# Altium PCB Carrier_Board.PcbDoc (part 2 of 2)
Units mil, origin at the board's own origin, x right, y up, seen from the top; angles counter-clockwise.
Board outline 6800 x 4000 mil, 4 copper layers (Top Layer, PWR, GND, Bottom Layer), stack 62.8 mil thick; 110 components, 87 nets, 805 pads, 134 vias.
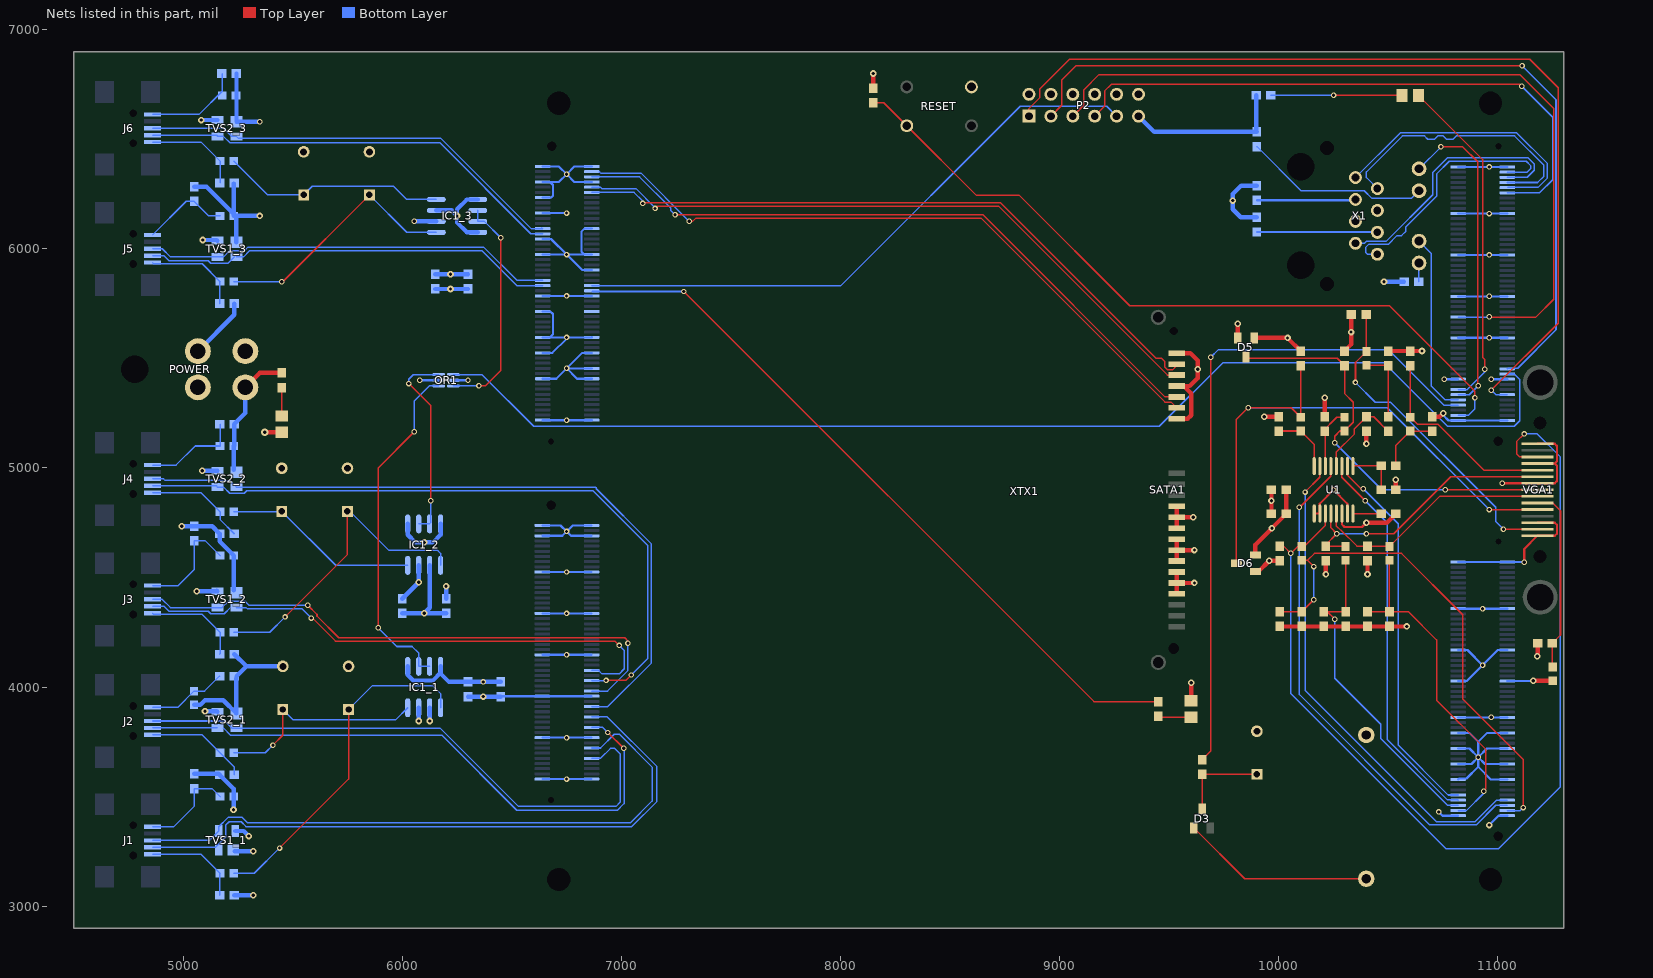
[diagram p4: the nets of this part, all layers, seen from the top]

## Part data
BATTERY: "16mm Battery Holder - Memory Protection Devices"
C1 C2 C4_1 C4_2 C4_3 C5_1 C5_2 C5_3 C8_1 C8_2 C8_3 C9_1 C9_2 C9_3 C10_1 C10_2 C10_3 C11_1 C11_2 C11_3 C12 C13 C14 C15 C16 C17 C18 C19 C20 C21 C22 C23 C24 C25 C26 C27 C28 C29: "Capacitor"
C3 C6_1 C6_2 C6_3 C7_1 C7_2 C7_3: "Polarized Capacitor (Radial)"
D3: "Dual Surface Mount Switching Diode"
D5 D6: "Low Capacitance Diode Array for ESD Protection"
ETH_LED PWR_LED SATA_LED: library part LED1, "Typical RED GaAs LED"
FB1_1 FB1_2 FB1_3 FB2_1 FB2_2 FB2_3 FB4_1 FB4_2 FB4_3 FB5 FB6 FB7 FB8 FB9 FB10 FB11 FB12: library part "Ferrite Bead", "Ferrite Bead"
FB3_1 FB3_2 FB3_3: library part "Ferrite Bead"
IC1_1 IC1_2 IC1_3: "Micrel MIC2026 Dual-Channel Power Distribution Switch"
J1 J2 J3 J4 J5 J6: "miniUSB Type B SMT Connector"
OR1: "3 Input OR Gate"
P2: "Header, 6-Pin, Dual row"
POWER: library part "0039300040 Mini-Fit 2x2 Right Angle"
R1 R2 R3 R4 R5 R6 R7 R8 R9 R10 R11 R12 R13 R14: "Resistor"
RESET: "FSM 6mm Series Switch"
SATA1: "SATA HDD, FCI Part# 10029364"
TVS1_1 TVS1_2 TVS1_3 TVS2_1 TVS2_2 TVS2_3: "IC TVS ARRAY 2-LINE 5V SOT-143"
U1: "VGA ESD Protection"
VGA1: library part VGA
X1: "Modular RJ45 Jack w/ Magnetics & LEDs"

## Via types
v1: diameter 25, hole 15, Top Layer to Bottom Layer, 85 vias
v2: diameter 30, hole 15, Top Layer to Bottom Layer, 47 vias
v3: diameter 35, hole 15, Top Layer to Bottom Layer, 1 vias
v4: diameter 30, hole 15, Top Layer to Bottom Layer, tented bottom, 1 vias

## Nets (pads, with @x,y where several pads share a name; then routed paths per layer and width w, separated by ;. In a path a pad name is that pad's centre, name@x,y a point inside that pad or via, vN(x,y) a via of type N, cw(c..) or ccw(c..) an arc to the next point about the centre after c; other vN are vias at no path point)
5V: C4_1.2 C4_2.2 C4_3.2 C5_1.2 C5_2.2 C5_3.2 C26.2 C27.2 D5.2 D6.2 FB12.1 IC1_1.1 IC1_1.4 IC1_1.7 IC1_2.1 IC1_2.4 IC1_2.7 IC1_3.1 IC1_3.4 IC1_3.7 OR1.5 P2.11 POWER.2 POWER.3 PWR_LED.1 R2.1 R3.1 R4.1 R10.2 R11.2 R14.2 SATA1.P7 SATA1.P8 SATA1.P9 SATA_LED.1 TVS1_1.4 TVS1_2.4 TVS1_3.4 TVS2_1.4 TVS2_2.4 TVS2_3.4 U1.1 U1.2 U1.7 XTX1.19 XTX1.20 XTX1.51 XTX1.52 XTX1.83 XTX1.84 XTX1.119 XTX1.151 XTX1.152 XTX1.174 XTX1.180 XTX1.183 XTX1.184 XTX1.239 XTX1.240 XTX1.253 XTX1.281 XTX1.282 XTX1.317 XTX1.318 XTX1.349 XTX1.350 XTX1.381 XTX1.382 | length 6976.4
  Top Layer w10: U1.1@10161.81,4791.73 U1.2@10187.01,4791.73 10187.01,4837.01 v1(10250,4900) 10312.99,4837.01 U1.7@10312.99,4791.73
  Top Layer w20: v3(5372.6,5162.6) PWR_LED.1@5450,5162.6 ; R14.2@8150,6733.46 v2(8150,6800) ; SATA1.P9@9535,4575 SATA1.P8@9535,4625 ; SATA1.P7@9535,4675 SATA1.P8@9535,4625 ; SATA_LED.1@9600,3937.4 v2(9600,4020) ; v2(9615,4625) SATA1.P8@9535,4625 ; D5.2@9812.6,5593.31 v2(9812.6,5657.4) ; D6.2@9893.31,4602.4 9893.31,4649.84 C26.2@10033.46,4790 C27.2@10033.46,4900 ; v2(10400,5110) R10.2@10400,5166.54 ; R11.2@10533.46,4900 v2(10533.46,4946.54) ; v2(11161.5,4028.5) FB12.1@11250,4028.5
  Bottom Layer w10: OR1.5@6233.46,5400 v1(6300,5400) ; XTX1.83@6639.37,3769.09 XTX1.84@6863.78,3769.09 ; XTX1.51@6639.37,4147.05 XTX1.52@6863.78,4147.05 ; XTX1.19@6639.37,4525 XTX1.20@6863.78,4525 ; XTX1.183@6640.35,5406.89 6702.76,5406.89 v1(6750,5454.13) ; XTX1.151@6640.35,5784.84 XTX1.152@6864.76,5784.84 ; XTX1.119@6640.35,6162.8 v1(6750,6162.8) ; XTX1.184@6864.76,5406.89 6797.24,5406.89 v1(6750,5454.13) ; XTX1.180@6864.76,5454.13 v1(6750,5454.13) ; XTX1.174@6864.76,5525 6820.87,5525 v1(6750,5454.13) ; v1(10754.92,5404.92) XTX1.318@10818.5,5404.92 ; XTX1.240@10818.5,3861.61 XTX1.239@11042.91,3861.61 ; XTX1.282@10818.5,4357.68 XTX1.281@11042.91,4357.68 ; XTX1.350@10818.5,5782.87 XTX1.349@11042.91,5782.87 ; XTX1.382@10818.5,6160.83 XTX1.381@11042.91,6160.83 ; v1(10970,5404.92) XTX1.317@11042.91,5404.92 ; XTX1.253@11042.91,4026.97 v2@11159.96,4026.97
  Bottom Layer w20: v2(5062.6,4437.4) TVS1_2.4@5156.69,4437.4 TVS1_2.4@5154.09,4440 ; v2(5082.6,6587.4) TVS2_3.4@5156.69,6587.4 ; v2(5087.4,4987.4) TVS2_2.4@5156.69,4987.4 ; v2(5090,6040) 5154.09,6040 TVS1_3.4@5156.69,6037.4 ; v2(5100,3890) 5154.09,3890 TVS2_1.4@5156.69,3887.4 ; TVS1_1.4@5237.4,3343.31 5276.69,3343.31 v2(5300,3320) ; C4_2.2@6000,4403.46 v2(6075,4478.46) IC1_2.7@6075,4555.51 ; IC1_1.1@6025,4094.49 6025,4055 6050,4030 6140,4030 6175,4065 IC1_1.4@6175,4094.49 ; IC1_2.1@6025,4744.49 6025,4695 6060,4660 6140,4660 6175,4695 IC1_2.4@6175,4744.49 ; v2(6075,3845) IC1_1.7@6075,3905.51 ; C5_3.2@6150,5883.46 C4_3.2@6300,5883.46 ; IC1_3.7@6155.51,6175 6225,6175 v2(6250,6150) ; IC1_1.4@6175,4061.93 6213.46,4023.46 C5_1.2@6300,4023.46 C4_1.2@6450,4023.46 ; C5_2.2@6200,4403.46 v2(6200,4460) ; IC1_3.4@6344.49,6075 6295,6075 6250,6120 v2(6250,6150) ; IC1_3.1@6344.49,6225 6295,6225 6250,6180 v2(6250,6150) ; P2.11@9360,6605 9431.54,6533.46 R3.1@9900,6533.46 ; R3.1@9896.54,6536.93 R4.1@9896.54,6700 ; v2(10480,5850) R2.1@10571.54,5850
  other v1: 6750,3769.09 10970,3861.61 6370,4023.46 6750,4147.05 10930,4357.68 6750,4525 10960,5782.87 6750,5784.84 10960,6160.83
  other v2: 6100,4660 9968.69,4725.23 6220,5883.46
BATT: R5.2 XTX1.308 | length 3101
  Top Layer w7: R5.2@9650,3668.46 9690,3708.46 v1(9690,5505)
  Bottom Layer w7: v1(9690,5505) 9725,5540 10500,5540 10753.19,5286.81 XTX1.308@10818.5,5286.81
DDCK: U1.11 XTX1.208 | length 1798.6
  Top Layer w7: U1.11@10287.8,5008.27 10287.8,4957.2 v1(10395,4850)
  Bottom Layer w7: v1(10395,4850) 10495,4750 10495,3760 10770,3485 XTX1.208@10817.17,3485 ; XTX1.208@10790.58,3485 XTX1.208@10817.17,3485 ; XTX1.208@10818.5,3483.66 XTX1.208@10817.17,3485
DDDA: U1.10 XTX1.210 | length 1769.6
  Top Layer w7: U1.10@10312.99,5008.27 10312.99,4967.01 10375,4905 v1(10385,4905)
  Bottom Layer w7: v1(10385,4905) 10545,4745 10545,3735 10772.72,3507.28 XTX1.210@10818.5,3507.28 XTX1.210@10791.92,3507.28
EXTSMI#: P2.3 XTX1.321 | length 3877.6
  Top Layer w7: P2.3@8960,6605 9010,6655 9010,6770 9075,6835 v1(11110,6835)
  Bottom Layer w7: XTX1.321@11042.91,5452.17 11045.75,5455 11090,5455 11265,5630 11265,6680 v1(11110,6835)
GND: BATTERY.- C1.2 C2.2 C3.2 C4_1.1 C4_2.1 C4_3.1 C5_1.1 C5_2.1 C5_3.1 C6_1.2 C6_2.2 C6_3.2 C7_1.2 C7_2.2 C7_3.2 C8_1.1 C8_2.1 C8_3.1 C9_1.1 C9_2.1 C9_3.1 C10_1.1 C10_2.1 C10_3.1 C11_1.1 C11_2.1 C11_3.1 C12.2 C13.2 C14.2 C15.2 C16.2 C17.2 C18.1 C19.1 C20.1 C21.1 C22.1 C23.1 C24.1 C25.1 C26.1 C27.1 C28.1 C29.1 D5.1 D6.1 FB2_1.1 FB2_2.1 FB2_3.1 FB4_1.1 FB4_2.1 FB4_3.1 IC1_1.6 IC1_2.6 IC1_3.6 OR1.2 P2.2 P2.4 P2.6 P2.8 P2.10 P2.12 POWER.1 POWER.4 R1.1 R7.2 R8.2 R9.2 RESET.4 SATA1.P4 SATA1.P5 SATA1.P6 SATA1.P10 SATA1.P11 SATA1.P12 SATA1.S1 SATA1.S4 SATA1.S7 TVS1_1.1 TVS1_2.1 TVS1_3.1 TVS2_1.1 TVS2_2.1 TVS2_3.1 U1.6 VGA1.5 VGA1.6 VGA1.7 VGA1.8 VGA1.10 X1.4 X1.5 XTX1.1 XTX1.2 XTX1.5 XTX1.6 XTX1.35 XTX1.36 XTX1.67 XTX1.68 XTX1.99 XTX1.100 XTX1.101 XTX1.102 XTX1.107 XTX1.108 XTX1.113 XTX1.126 XTX1.129 XTX1.135 XTX1.136 XTX1.142 XTX1.157 XTX1.167 XTX1.168 XTX1.173 XTX1.199 XTX1.200 XTX1.201 XTX1.202 XTX1.215 XTX1.216 XTX1.221 XTX1.222 XTX1.227 XTX1.228 XTX1.233 XTX1.234 XTX1.254 XTX1.265 XTX1.266 XTX1.299 XTX1.300 XTX1.301 XTX1.302 XTX1.333 XTX1.334 XTX1.365 XTX1.366 XTX1.399 XTX1.400 | length 15140.4
  Top Layer w10: U1.6@10287.8,4791.73 10287.8,4742.2 10300,4730 10380,4730 v2(10400,4750) ; v1(11020,4930) VGA1.8@11180,4930 11260,4930 11270,4940 11270,5010 11260,5020 ; v1(11120,4570) 11120,4630 VGA1.5@11180,4690 11260,4690 11270,4700 11270,4740 11260,4750 VGA1.10@11180,4750 ; VGA1.7@11180,5020 11260,5020 ; VGA1.6@11180,5110 11260,5110 11270,5100 11270,5030 11260,5020
  Top Layer w20: POWER.4@5283.94,5367.32 5350.08,5433.46 R1.1@5450,5433.46 ; SATA1.S7@9534.65,5223.82 9583.82,5223.82 9600,5240 9600,5340 SATA1.S4@9566.18,5373.82 ; SATA1.S4@9534.65,5373.82 SATA1.S4@9566.18,5373.82 ; SATA1.S1@9534.65,5523.82 9596.18,5523.82 9630,5490 v2(9630,5450) 9630,5410 9593.82,5373.82 SATA1.S4@9566.18,5373.82 ; SATA1.P12@9535,4425 SATA1.P11@9535,4475 ; SATA1.P10@9535,4525 SATA1.P11@9535,4475 ; SATA1.P6@9535,4725 SATA1.P5@9535,4775 ; SATA1.P4@9535,4825 SATA1.P5@9535,4775 ; v2(9610,4775) SATA1.P5@9535,4775 ; v2(9615,4475) SATA1.P11@9535,4475 ; D5.1@9887.4,5593.31 v2(10040.16,5593.31) C29.1@10100,5533.46 ; D6.1@9893.31,4527.6 9907.6,4527.6 v2(9956.54,4576.54) C17.2@10005,4576.54 ; v2(9933.46,5233.46) C22.1@10000,5233.46 ; C26.1@9966.54,4790 C27.1@9966.54,4900 ; R9.2@10005,4276.54 C14.2@10105,4276.54 R8.2@10205,4276.54 C13.2@10305,4276.54 R7.2@10405,4276.54 C12.2@10505,4276.54 v2(10583.46,4276.54) ; C23.1@10210,5233.46 v2(10210,5320) ; v2(10215,4515) C16.2@10215,4576.54 ; C28.1@10300,5533.46 10330,5563.46 v2(10330,5620) ; v2@10331.54,5621.54 C20.1@10331.54,5700 ; v2(10400,4750) 10493.46,4750 C21.1@10533.46,4790 ; v2(10405,4515) C15.2@10405,4576.54 ; C24.1@10500,5533.46 C19.1@10600,5533.46 v2(10653.46,5533.46) ; C25.1@10700,5233.46 10733.46,5233.46 v2(10750,5250) ; v2@11181.54,4141.54 C18.1@11181.54,4200
  Bottom Layer w10: v1(6080,5400) OR1.2@6166.54,5400 ; C4_1.1@6451.54,3958.07 XTX1.67@6639.37,3958.07 XTX1.68@6863.78,3958.07 ; XTX1.99@6639.37,3580.12 XTX1.100@6863.78,3580.12 ; XTX1.35@6639.37,4336.02 XTX1.36@6863.78,4336.02 ; XTX1.5@6639.37,4690.35 6730.35,4690.35 v1(6750,4710) ; XTX1.1@6639.37,4737.6 6722.4,4737.6 v1(6750,4710) ; XTX1.199@6640.35,5217.91 XTX1.200@6864.76,5217.91 ; XTX1.173@6640.35,5525 6685,5525 v1@6750,5590 ; XTX1.157@6640.35,5713.98 6676.02,5713.98 6687.79,5702.21 6687.79,5609.65 XTX1.167@6674.01,5595.87 ; XTX1.135@6640.35,5973.82 v1(6750,5973.82) ; XTX1.129@6640.35,6044.69 6679.13,6044.69 v1(6750,5973.82) ; XTX1.113@6640.35,6233.66 6680,6233.66 6687.79,6241.45 6687.79,6290.75 XTX1.107@6674.01,6304.53 ; XTX1.107@6640.35,6304.53 XTX1.107@6674.01,6304.53 ; XTX1.101@6640.35,6375.39 6714.61,6375.39 v1(6750,6340) ; XTX1.167@6640.72,5595.5 v1(6750,5595.5) 6864.4,5595.5 XTX1.168@6864.76,5595.87 ; XTX1.6@6863.78,4690.35 6769.65,4690.35 v1(6750,4710) ; XTX1.2@6863.78,4737.6 6777.6,4737.6 v1(6750,4710) ; XTX1.142@6864.76,5902.95 6820.87,5902.95 v1(6750,5973.82) ; XTX1.136@6864.76,5973.82 XTX1.136@6831.11,5973.82 ; XTX1.126@6864.76,6091.93 6831.11,6091.93 6817.33,6078.15 6817.33,5987.6 XTX1.136@6831.11,5973.82 ; XTX1.108@6864.76,6304.53 6785.47,6304.53 v1(6750,6340) ; XTX1.102@6864.76,6375.39 6785.39,6375.39 v1(6750,6340) ; v1(10730,3430) 10747.2,3412.8 XTX1.202@10818.5,3412.8 ; v2@10750,5240 10774.06,5215.94 XTX1.302@10818.5,5215.94 XTX1.301@11042.91,5215.94 ; XTX1.222@10818.5,3649.02 10879.02,3649.02 v1(10910,3680) ; XTX1.228@10818.5,3719.88 10870.12,3719.88 v1(10910,3680) ; XTX1.234@10818.5,3790.75 10869.25,3790.75 10910,3750 ; XTX1.254@10818.5,4026.97 10856.97,4026.97 v1(10930,4100) ; XTX1.266@10818.5,4168.7 10861.3,4168.7 v1(10930,4100) ; XTX1.300@10818.5,4570.28 XTX1.299@11042.91,4570.28 ; XTX1.334@10818.5,5593.9 XTX1.333@11042.91,5593.9 ; XTX1.366@10818.5,5971.85 XTX1.365@11042.91,5971.85 ; XTX1.400@10818.5,6373.43 XTX1.399@11042.91,6373.43 ; XTX1.216@10820.35,3580 XTX1.216@10818.5,3578.15 10823.24,3582.88 10856.89,3582.88 10910,3635.99 ; v2(10960,3370) 11002.8,3412.8 XTX1.201@11042.91,3412.8 ; XTX1.215@11042.91,3578.15 10967.84,3578.15 10910,3635.99 ; XTX1.221@11042.91,3649.02 10940.98,3649.02 v1(10910,3680) ; XTX1.227@11042.91,3719.88 10949.88,3719.88 v1(10910,3680) ; XTX1.233@11042.91,3790.75 10950.75,3790.75 10910,3750 ; XTX1.265@11042.91,4168.7 10998.7,4168.7 v1(10930,4100) ; XTX1.299@11043.19,4570 v1(11120,4570) ; XTX1.107@6674.01,6304.53 6714.53,6304.53 v1(6750,6340) ; v1(6750,5973.82) XTX1.136@6831.11,5973.82 ; 10910,3635.99 v1(10910,3680) ; v1(10910,3680) 10910,3750
  Bottom Layer w20: v2(4993.46,4733.46) C9_2.1@5050,4733.46 5133.07,4733.46 C10_2.1@5166.54,4700 5166.54,4664.96 FB2_2.1@5231.5,4600 TVS1_2.1@5231.5,4441.34 ; C9_1.1@5050,3603.46 C10_1.1@5163.07,3603.46 ; FB4_1.1@5050,3918.5 5078.5,3918.5 5100,3940 5182.83,3940 TVS2_1.1@5243.31,3879.53 C11_1.1@5243.31,4040.16 ; C9_3.1@5050,6283.46 5106.54,6283.46 FB2_3.1@5231.5,6158.5 ; POWER.1@5067.4,5532.68 5233.46,5698.74 C8_3.1@5233.46,5750 ; C10_1.1@5166.54,3600 5231.5,3535.04 FB2_1.1@5231.5,3500 v4@5231.5,3441.5 ; TVS2_2.1@5231.5,4991.34 FB4_2.1@5231.5,5100 ; C10_3.1@5231.5,6298.03 FB2_3.1@5231.5,6158.5 ; C8_1.1@5233.46,3050 v2(5320,3050) ; C8_2.1@5233.46,4150 5289.08,4094.39 ; FB4_2.1@5233.46,5101.97 C11_2.1@5233.46,5200 5283.94,5250.47 POWER.4@5283.94,5367.32 ; TVS1_1.1@5236.22,3250 v2(5320,3250) ; TVS1_3.1@5243.31,6029.53 FB2_3.1@5243.31,6138.19 ; C11_3.1@5243.78,6799.69 5243.78,6580 v1(5350,6580) ; C11_1.1@5244.69,4050 5289.08,4094.39 ; v2(5350,6150) FB2_3.1@5231.5,6150 FB2_3.1@5231.5,6158.5 ; C7_1.2@5455,4094.39 5289.08,4094.39 ; C4_2.1@6000,4336.54 v2(6100,4336.54) ; v1(6055,6125) IC1_3.6@6155.51,6125 ; v2(6125,3845) IC1_1.6@6125,3905.51 ; IC1_2.6@6125,4555.51 6125,4361.54 v2(6100,4336.54) ; C5_3.1@6150,5816.54 C4_3.1@6300,5816.54 ; C5_2.1@6200,4336.54 v2(6100,4336.54) ; C5_1.1@6300,3956.54 v2(6370,3956.54) C4_1.1@6450,3956.54 ; C2.2@9900,6143.46 9826.54,6143.46 9790,6180 v2(9790,6220) 9790,6250 9828.46,6288.46 C1.2@9900,6288.46
  other v1: 6750,3580.12 6750,4336.02 6750,5217.91 10960,5593.9 10960,5971.85 10960,6373.43
  other v2: 11180,4140 9966.54,4850 6220,5816.54
  other v4: 5230,3440
GPE1#: P2.5 XTX1.342 | length 3719.2
  Top Layer w7: P2.5@9060,6605 9110,6655 9110,6725 9180,6795 11100,6795 11255,6640 11255,5770 11173.39,5688.39 v1@10955,5688.39
  Bottom Layer w7: XTX1.342@10818.5,5688.39 v1@10955,5688.39
  other v1: 10960,5690
GPE2#: P2.7 XTX1.389 | length 2770
  Top Layer w7: P2.7@9160,6605 9205,6650 9205,6720 9235,6750 11100,6750 v1(11108.47,6741.53)
  Bottom Layer w7: XTX1.389@11042.91,6255.31 11190.31,6255.31 11250,6315 11250,6600 v1(11108.47,6741.53)
HSY: C28.2 D5.3 FB10.2 VGA1.13 | length 1910.5
  Top Layer w7: D5.3@9859.84,5516.54 D5.3@9850,5506.69 9856.69,5500 10266.54,5500 C28.2@10300,5466.54 10300,5340 10340,5300 10340,5208.5 FB10.2@10300,5168.5 10278.5,5168.5 10255,5145 v1(10255,5115) ; v1(10760,4900) VGA1.13@11180,4900
  Bottom Layer w7: v1(10255,5115) 10470,4900 v1(10760,4900)
IL_SATA: XTX1.158
NetBATT1_+: BATTERY.+ D3.1 | length 882.4
  Top Layer w7: D3.1@9612.6,3356.69 9844.29,3125 BATTERY.+@10399,3125
NetbtnReset_1: R14.1 RESET.1 XTX1.304 | length 3459.4
  Top Layer w7: R14.1@8150,6666.54 8197.24,6666.54 RESET.1@8302.36,6561.42 8618.78,6245 8815,6245 9320,5740 10505,5740 10895,5350 v1(10895,5320)
  Bottom Layer w7: XTX1.304@10818.5,5239.57 10864.57,5239.57 10895,5270 v1(10895,5320)
NetC1_1: C1.1 X1.6 | length 446.5
  Bottom Layer w10: C1.1@9900,6221.54 X1.6@10346.54,6221.54
NetC2_1: C2.1 X1.3 | length 548.5
  Bottom Layer w10: C2.1@9900,6076.54 X1.3@10448.46,6076.54
NetC3_1: C3.1 D3.3 R5.1 | length 429.3
  Top Layer w7: D3.3@9650,3443.31 R5.1@9650,3601.54 C3.1@9899.96,3601.54 ; C3.1@9885.04,3616.54 C3.1@9900,3601.57
NetC6_U_USB1_1: C6_1.1 FB1_1.1 IC1_1.5 | length 1570.7
  Top Layer w7: v1(5440,3265) 5755,3580 C6_1.1@5755,3897.54
  Bottom Layer w7: FB1_1.1@5231.5,3150 5325,3150 v1(5440,3265) ; C6_1.1@5755,3897.54 5862.46,4005 6140,4005 6175,3970 IC1_1.5@6175,3905.51 IC1_1.5@6175,3913.61
NetC6_U_USB2_1: C6_2.1 FB1_2.1 IC1_2.5 | length 1421
  Top Layer w7: v1(5465,4320) 5750,4605 C6_2.1@5750,4801.57
  Bottom Layer w7: FB1_2.1@5231.5,4250 5395,4250 v1(5465,4320) ; C6_2.1@5750,4801.57 5761.04,4801.57 5937.61,4625 6160,4625 6175,4610 IC1_2.5@6175,4555.51
NetC6_U_USB3_1: C6_3.1 FB1_3.1 IC1_3.5 | length 1164
  Top Layer w7: v1@5454.46,5850 C6_3.1@5850,6245.54
  Bottom Layer w7: FB1_3.1@5231.5,5850 v1(5450,5850) ; C6_3.1@5860,6245.54 C6_3.1@5850,6245.54 6020.54,6075 IC1_3.5@6155.51,6075
NetC7_U_USB1_1: C7_1.1 FB3_1.1 IC1_1.8 | length 986.9
  Top Layer w7: v1(5410,3735) 5455,3780 C7_1.1@5455,3897.54
  Bottom Layer w7: FB3_1.1@5231.5,3700 5375,3700 v1(5410,3735) ; C7_1.1@5455,3897.54 5502.54,3850 5969.49,3850 IC1_1.8@6025,3905.51
NetC7_U_USB2_1: C7_2.1 FB3_2.1 IC1_2.8 | length 893.9
  Bottom Layer w7: FB3_2.1@5231.5,4800 C7_2.1@5448.43,4800 ; C7_2.1@5450,4801.57 5696.06,4555.51 IC1_2.8@6025,4555.51
NetC7_U_USB3_1: C7_3.1 FB3_3.1 IC1_3.8 | length 1029.2
  Bottom Layer w7: FB3_3.1@5231.5,6400 5385.96,6245.54 C7_3.1@5550,6245.54 5589.46,6285 5960,6285 6020,6225 IC1_3.8@6155.51,6225
NetC8_U_USB1_2: C8_1.2 FB1_1.2 J1.1 | length 441.9
  Bottom Layer w7: J1.1@4860.63,3237.01 5081.5,3237.01 FB1_1.2@5168.5,3150 ; C8_1.2@5166.54,3050 FB1_1.2@5166.54,3148.03
NetC8_U_USB2_2: C8_2.2 FB1_2.2 J3.1 | length 444.7
  Bottom Layer w7: J3.1@4860.63,4337.01 4866.04,4331.6 5086.91,4331.6 FB1_2.2@5168.5,4250 5168.5,4151.97 C8_2.2@5166.54,4150
NetC8_U_USB3_2: C8_3.2 FB1_3.2 J5.1 | length 441.9
  Bottom Layer w7: J5.1@4860.63,5937.01 4866.04,5931.6 5086.91,5931.6 FB1_3.2@5168.5,5850 ; C8_3.2@5166.54,5750 FB1_3.2@5166.54,5848.03
NetC9_U_USB1_2: C9_1.2 FB2_1.2 J1.5 | length 442.7
  Bottom Layer w7: J1.5@4860.63,3362.99 4957.99,3362.99 5050,3455 C9_1.2@5050,3536.54 5131.97,3536.54 FB2_1.2@5168.5,3500
NetC9_U_USB2_2: C9_2.2 FB2_2.2 J3.5 | length 496.8
  Bottom Layer w7: J3.5@4860.63,4462.99 4977.99,4462.99 5050,4535 C9_2.2@5050,4666.54 5101.97,4666.54 FB2_2.2@5168.5,4600
NetC9_U_USB3_2: C9_3.2 FB2_3.2 J5.5 | length 399
  Bottom Layer w7: J5.5@4860.63,6062.99 5014.17,6216.54 C9_3.2@5050,6216.54 5116.54,6150 FB2_3.2@5168.5,6150
NetC10_U_USB1_2: C10_1.2 FB3_1.2 J2.1 | length 468.8
  Bottom Layer w7: J2.1@4860.63,3782.01 5086.5,3782.01 FB3_1.2@5168.5,3700 5233.46,3635.04 C10_1.2@5233.46,3600
NetC10_U_USB2_2: C10_2.2 FB3_2.2 J4.1 | length 470.8
  Bottom Layer w7: J4.1@4860.63,4887.01 5081.5,4887.01 FB3_2.2@5168.5,4800 5168.5,4764.96 C10_2.2@5233.46,4700
NetC10_U_USB3_2: C10_3.2 FB3_3.2 J6.1 | length 441.9
  Bottom Layer w7: J6.1@4860.63,6487.01 5081.5,6487.01 FB3_3.2@5168.5,6400 C10_3.2@5168.5,6301.97
NetC11_U_USB1_2: C11_1.2 FB4_1.2 J2.5 | length 364.7
  Bottom Layer w7: J2.5@4860.63,3907.99 4976.5,3907.99 FB4_1.2@5050,3981.5 5098.03,3981.5 C11_1.2@5166.54,4050
NetC11_U_USB2_2: C11_2.2 FB4_2.2 J4.5 | length 441.9
  Bottom Layer w7: J4.5@4860.63,5012.99 4967.99,5012.99 5055,5100 FB4_2.2@5168.5,5100 C11_2.2@5168.5,5198.03
NetC11_U_USB3_2: C11_3.2 FB4_3.2 J6.5 | length 441.1
  Bottom Layer w7: J6.5@4860.63,6612.99 5072.99,6612.99 5178.5,6718.5 C11_3.2@5178.5,6798.03
NetC12_1: C12.1 FB7.1 R7.1 XTX1.204 | length 1549.6
  Top Layer w7: R7.1@10405,4343.46 C12.1@10505,4343.46 ; FB7.1@10505,4578.5 C12.1@10505,4343.46 ; v1(10935,3525) 10945,3535 10945,3715 10720,3940 10720,4215 10591.54,4343.46 C12.1@10505,4343.46
  Bottom Layer w7: XTX1.204@10818.5,3436.42 10856.42,3436.42 10935,3515 v1(10935,3525)
NetC13_1: C13.1 FB6.1 R8.1 XTX1.206 | length 1543.8
  Top Layer w7: R8.1@10205,4343.46 R8.1@10221.54,4343.46 ; v1(10255,4310) R8.1@10221.54,4343.46 ; FB6.1@10305,4578.5 C13.1@10305,4343.46 ; C13.1@10311.54,4343.46 C13.1@10305,4343.46 ; C13.1@10321.54,4343.46 C13.1@10305,4343.46 ; R8.1@10221.54,4343.46 C13.1@10305,4343.46
  Bottom Layer w7: v1(10255,4310) 10255,4040 10465,3830 10465,3765.08 10770.04,3460.04 XTX1.206@10818.5,3460.04 XTX1.206@10791.92,3460.04
NetC14_1: C14.1 FB5.1 R9.1 XTX1.203 | length 2305.3
  Top Layer w7: R9.1@10005,4343.46 C14.1@10105,4343.46 v1(10160,4398.46) ; FB5.1@10105,4578.5 10131.5,4578.5 ; v1(10160,4550) 10131.5,4578.5 ; v1(11115,3450) 11115,3670 10840,3945 10840,4330 10560,4610 10162.99,4610 10131.5,4578.5
  Bottom Layer w7: v1(10160,4398.46) v1(10160,4550) ; XTX1.203@11042.91,3436.42 11101.42,3436.42 v1(11115,3450)
NetC15_1: C15.1 FB7.2 U1.5 VGA1.3 | length 1104.4
  Top Layer w7: U1.5@10262.6,4791.73 10262.6,4735.48 10283.58,4714.5 10285.5,4714.5 10356.54,4643.46 C15.1@10405,4643.46 FB7.2@10503.03,4643.46 ; FB7.2@10505,4641.5 10733.5,4870 VGA1.3@11180,4870
NetC16_1: C16.1 FB6.2 U1.4 VGA1.2 | length 1294.6
  Top Layer w7: U1.4@10237.4,4791.73 10237.4,4727.6 v1(10265,4700) ; v1@10261.54,4700 v1(10265,4700) ; FB6.2@10303.03,4643.46 C16.1@10215,4643.46 10215,4650 v1(10265,4700) ; v1(10400,4700) 10525,4700 10785,4960 VGA1.2@11180,4960
  Bottom Layer w7: v1(10265,4700) v1(10400,4700)
NetC17_1: C17.1 FB5.2 U1.3 VGA1.1 | length 4527.6
  Top Layer w7: C17.1@10006.97,4641.5 C17.1@10023.5,4641.5 ; C17.1@10021.54,4643.46 C17.1@10023.5,4641.5 ; U1.3@10212.2,4791.73 10212.2,4737.2 10116.5,4641.5 FB5.2@10105,4641.5 10086.5,4641.5 v1(10055,4610) C17.1@10023.5,4641.5 ; v1(11120,5155) 11085,5120 11085,5065 11100,5050 VGA1.1@11180,5050
  Bottom Layer w7: v1(10055,4610) 10055,3970 10762.5,3262.5 11002.5,3262.5 11285,3545 11285,5050 11180,5155 v1(11120,5155)
NetC18_2: C18.2 FB12.2 VGA1.9 | length 847
  Top Layer w7: VGA1.9@11180,4840 11250,4840 11285.5,4804.5 11285.5,4237.04 C18.2@11248.46,4200 FB12.2@11248.46,4093.03
NetC19_2: C19.2 FB8.2 VGA1.12 | length 915.1
  Top Layer w7: C19.2@10600,5466.54 FB8.2@10600,5231.5 10631.5,5200 10725,5200 10935,4990 VGA1.12@11180,4990
NetC20_2: C20.2 FB9.2 VGA1.15 | length 1474.8
  Top Layer w7: v1(10350,5390) 10350,5481.5 FB9.2@10400,5531.5 ; FB9.2@10398.46,5533.03 C20.2@10398.46,5700 ; v1(11025,4720) VGA1.15@11180,4720
  Bottom Layer w7: v1(10350,5390) 10440,5300 10510,5300 10990,4820 10990,4755 v1(11025,4720)
NetC21_2: C21.2 U1.8 | length 126.6
  Top Layer w7: U1.8@10338.19,4791.73 C21.2@10464.8,4791.73
NetC22_2: C22.2 FB11.1 U1.16 | length 283.9
  Top Layer w7: C22.2@10001.97,5168.5 FB11.1@10100,5168.5 10161.81,5106.69 U1.16@10161.81,5008.27
NetC23_2: C23.2 FB10.1 U1.14 | length 290.2
  Top Layer w7: U1.14@10212.2,5008.27 10212.2,5154.33 10200,5166.54 10264.96,5231.5 FB10.1@10300,5231.5
NetC24_2: C24.2 FB9.1 R13.1 | length 331.1
  Top Layer w7: FB9.1@10400,5468.5 C24.2@10498.03,5468.5 ; R13.1@10500,5233.46 C24.2@10500,5466.54
NetC25_2: C25.2 FB8.1 R12.1 | length 284.1
  Top Layer w7: R12.1@10533.46,5010 10533.46,5101.97 FB8.1@10600,5168.5 ; FB8.1@10601.97,5166.54 C25.2@10700,5166.54
NetD2_1: ETH_LED.1 R4.2 | length 599.1
  Top Layer w7: v1(10250,6700) ETH_LED.1@10562.6,6700
  Bottom Layer w7: R4.2@9963.46,6700 v1(10250,6700)
NetD2_2: ETH_LED.2 XTX1.314 | length 1542.4
  Top Layer w7: ETH_LED.2@10637.4,6700 10930,6407.4 10930,5505 10940,5495 v1(10940,5450)
  Bottom Layer w7: XTX1.314@10818.5,5357.68 10860.15,5357.68 10940,5437.53 v1(10940,5450)
NetD4_2: R6.2 SATA_LED.2 | length 146.1
  Top Layer w7: R6.2@9453.94,3862.6 SATA_LED.2@9600,3862.6
NetIC1_U_USB1_2: IC1_1.2 IC1_1.3 OR1.1 | length 1586.8
  Top Layer w7: v1(5890,4270) 5890,5000 v1(6055,5165)
  Bottom Layer w7: v1(5890,4270) 5975,4185 6045,4185 6075,4155 IC1_1.2@6075,4094.49 IC1_1.3@6125,4094.49 ; v1(6055,5165) 6055,5305 6124.41,5374.41 OR1.1@6166.54,5374.41
NetIC1_U_USB2_2: IC1_2.2 IC1_2.3 OR1.3 | length 908.7
  Top Layer w7: v1(6030,5385) 6130,5285 v1(6130,4850)
  Bottom Layer w7: v1(6030,5385) 6030,5405 6050.59,5425.59 OR1.3@6166.54,5425.59 OR1.3@6149.85,5425.59 ; IC1_2.2@6075,4744.49 IC1_2.3@6125,4744.49 ; IC1_2.3@6130,4749.49 v1(6130,4850)
NetIC1_U_USB3_2: IC1_3.2 IC1_3.3 OR1.6 | length 1037.4
  Top Layer w7: v1(6350,5374.41) 6379.41,5374.41 6450,5445 v1(6450,6050)
  Bottom Layer w7: OR1.6@6233.46,5374.41 v1(6350,5374.41) ; IC1_3.2@6344.49,6175 IC1_3.3@6344.49,6125 6375,6125 v1(6450,6050)
NetPWR_LED_2: PWR_LED.2 R1.2 | length 129.1
  Top Layer w7: PWR_LED.2@5450,5237.4 R1.2@5450,5366.54
NetR2_2: R2.2 X1.9 | length 83.5
  Bottom Layer w7: R2.2@10638.46,5850 X1.9@10638.46,5933.46
NetR3_2: R3.2 X1.11 | length 852.5
  Bottom Layer w7: R3.2@9900,6466.54 10101.51,6265.03 10390.03,6265.03 10425.06,6230 10605,6230 X1.11@10640,6265
NetR6_1: R6.1 XTX1.150 | length 3357
  Top Layer w7: v1(7285,5805) 9156.54,3933.46 R6.1@9450,3933.46
  Bottom Layer w7: XTX1.150@6868.23,5805 v1(7285,5805)
NetR10_1: R10.1 R13.2 U1.12 | length 409.6
  Top Layer w7: U1.12@10262.6,5008.27 10262.6,5072.4 10345,5154.8 ; 10345,5155 10345,5178.46 R10.1@10400,5233.46 10433.07,5233.46 R13.2@10500,5166.54
NetR11_1: R11.1 R12.2 U1.9 | length 236.6
  Top Layer w7: U1.9@10339.92,5010 R12.2@10466.54,5010 R11.1@10466.54,4900
NetU1_13: U1.13 XTX1.205 | length 2335.1
  Top Layer w7: v1(10094.01,4820.99) 10095.99,4820.99 10237.4,4962.4 U1.13@10237.4,5008.27
  Bottom Layer w7: v1(10094.01,4820.99) 10094.01,3965.99 10689,3371 10901,3371 10990.04,3460.04 XTX1.205@11042.91,3460.04
NetU1_15: U1.15 XTX1.207 | length 2304.6
  Top Layer w7: v1(10120,4890) 10187.01,4957.01 U1.15@10187.01,5008.27 U1.15@10187.01,4967.01
  Bottom Layer w7: v1(10120,4890) 10120,3985 10720,3385 10895,3385 10993.66,3483.66 XTX1.207@11042.91,3483.66
NetX1_10: X1.10 XTX1.310 | length 833
  Bottom Layer w7: X1.10@10640,6035 10695,5980 10695,5375 10759.57,5310.43 XTX1.310@10818.5,5310.43
NetX1_12: X1.12 XTX1.312 | length 1468.9
  Top Layer w7: v1(10740,6465) 10840,6465 10908,6397 10908,5377 v1(10910,5375)
  Bottom Layer w7: X1.12@10640,6365 v1(10740,6465) ; XTX1.312@10818.5,5334.06 10869.06,5334.06 v1(10910,5375)
OVCR#: OR1.4 XTX1.319 | length 5470.4
  Bottom Layer w7: OR1.4@6233.46,5425.59 6364.41,5425.59 6600,5190 9455,5190 9745,5480 10480,5480 10770,5190 11075,5190 11100,5215 11100,5402.99 11074.45,5428.54 XTX1.319@11042.91,5428.54
RSMRST#: P2.1 XTX1.311 | length 4240.4
  Top Layer w7: P2.1@8860,6605 8860,6640 8910,6690 8910,6730 9045,6865 11145,6865 11275,6735 11275,5660 v1(10970,5355)
  Bottom Layer w7: v1(10970,5355) 10990.94,5334.06 XTX1.311@11042.91,5334.06 XTX1.311@11010.94,5334.06
RX_N: SATA1.S5 XTX1.106 | length 3091.7
  Top Layer w7: v1@7246,6156 8649,6156 9481.18,5323.82 SATA1.S5@9534.65,5323.82
  Bottom Layer w7: XTX1.106@6864.76,6328.15 7082.81,6328.15 7225,6185.96 7225,6175 v1(7245,6155)
RX_P: SATA1.S6 XTX1.104 | length 3094.8
  Top Layer w7: v1(7310,6125) 7325,6125 7340,6140 8640.96,6140 9480.43,5300.52 9507.94,5300.52 SATA1.S6@9534.65,5273.82
  Bottom Layer w7: XTX1.104@6898.77,6351.77 6905,6345.54 7089.46,6345.54 v1(7310,6125)
RXD_N: X1.8 XTX1.391 | length 1284.9
  Bottom Layer w7: X1.8@10350,6325 10555,6530 11085,6530 11226,6389 11226,6323.37 11182.63,6280 XTX1.391@11043.98,6280
RXD_P: X1.7 XTX1.393 | length 1282.7
  Bottom Layer w7: X1.7@10450,6275 10400,6325 10400,6350.96 10564.04,6515 10665,6515 10680,6500 10710,6500 10725,6515 10750,6515 10765,6500 10795,6500 10810,6515 11075.96,6515 11209,6381.96 11209,6330.41 11181.09,6302.5 XTX1.393@11042.97,6302.5
TX_N: SATA1.S3 XTX1.110 | length 3036.6
  Top Layer w7: v1(7153.47,6184) 7155,6184 7166,6195 8720.96,6195 9492.14,5423.82 SATA1.S3@9534.65,5423.82
  Bottom Layer w7: XTX1.110@6864.76,6280.91 6903.77,6280.91 6910,6274.67 7066.1,6274.67 7155,6185.77 v1@7155,6184
TX_P: SATA1.S2 XTX1.112 | length 3032.9
  Top Layer w7: v1@7100,6210 8730,6210 9440,5500 9465,5500 9480,5485 9480,5460 9492.89,5447.11 9515,5447.11 SATA1.S2@9534.65,5466.76
  Bottom Layer w7: XTX1.112@6864.76,6257.28 7057.72,6257.28 7097,6218 v1(7097,6207)
TXD_N: X1.2 XTX1.395 | length 1213.9
  Bottom Layer w7: X1.2@10350,6025 10390.96,6025 10400.93,6034.97 10490.93,6034.97 10703,6247.04 10703,6348 10771,6416 11136.63,6416 11166,6386.63 11166,6358.37 11133.81,6326.18 XTX1.395@11042.91,6326.18
TXD_P: X1.1 XTX1.397 | length 1212.8
  Bottom Layer w7: X1.1@10462,5975 X1.1@10450,5975 10405,5975 10396.01,5983.99 10396.01,6006.01 10410,6020 10500,6020 10540,6060 10560,6060 10580,6080 10580,6100 10720,6240 10720,6340.96 10778.04,6399 11129.59,6399 11149,6379.59 11149,6365.41 11133.59,6350 XTX1.397@11043.11,6350
USB0_N: J1.2 TVS1_1.2 XTX1.76 | length 2988.8
  Bottom Layer w7: J1.2@4860.63,3268.5 5146.94,3268.5 5148.86,3270.43 5195,3316.57 5195,3370 5210,3385 5265,3385 5287,3363 7047.04,3363 7162,3477.96 7162,3637.04 6935.46,3863.58 XTX1.76@6863.78,3863.58
USB0_P: J1.3 TVS1_1.3 XTX1.88 | length 2904.8
  Bottom Layer w7: J1.3@4860.63,3300 5119.29,3300 TVS1_1.3@5162.6,3343.31 5162.6,3362.6 5205,3405 5270,3405 5295,3380 7040,3380 7140,3480 7140,3635 6990.78,3784.22 6967.37,3784.22 6905,3721.85 XTX1.88@6863.78,3721.85
USB1_N: J2.2 TVS2_1.3 XTX1.80 | length 2730.7
  Top Layer w7: v1(6937.63,3792.57) v1(7011.04,3721.07)
  Bottom Layer w7: J2.2@4860.63,3813.5 TVS2_1.3@5156.69,3813.5 ; 5184.17,3812.6 5216.76,3780 6180.96,3780 6522.96,3438 6982.04,3438 7012,3467.96 v1@7012,3721.07 ; XTX1.80@6863.78,3816.34 6913.66,3816.34 v1@6937.53,3792.47
USB1_P: J2.3 TVS2_1.2 XTX1.92 | length 2684.6
  Bottom Layer w7: J2.3@4860.63,3845 5190,3845 5222.4,3812.6 TVS2_1.2@5243.31,3812.6 6172.4,3812.6 6530,3455 6975,3455 6995,3475 6995,3695 6970,3720 6950,3720 6904.61,3674.61 XTX1.92@6863.78,3674.61
USB2_N: J3.2 TVS1_2.2 XTX1.58 | length 2481.2
  Top Layer w7: v1(5585,4315) 5590,4315 5695,4210 6970,4210 v1(6990,4190)
  Bottom Layer w7: J3.2@4860.63,4368.5 4912.45,4368.5 4935.36,4345.6 5114.55,4345.6 5125.77,4334.38 5187.62,4334.38 5215.83,4362.6 ; TVS1_2.2@5243.31,4362.6 5287.38,4362.6 5293.28,4356.69 5543.31,4356.69 v1(5585,4315) ; XTX1.58@6863.78,4076.18 6895.31,4076.18 6911.49,4060 6990,4060 7013,4083 7013,4167 v1(6990,4190)
USB2_P: J3.3 TVS1_2.3 XTX1.66 | length 2615.7
  Top Layer w7: v1(5568.86,4373.69) 5611,4331.55 5611,4324 5710,4225 7015,4225 7030,4210 v1(7030,4200)
  Bottom Layer w7: J3.3@4860.63,4400 4905,4400 4942.4,4362.6 TVS1_2.3@5156.69,4362.6 5178.02,4362.6 5206.23,4390.81 5283.2,4390.81 5300.33,4373.69 v1(5568.86,4373.69) ; XTX1.66@6863.78,3981.69 6936.69,3981.69 7030,4075 v1(7030,4200)
USB3_N: J4.2 TVS2_2.3 XTX1.62 | length 3195.3
  Top Layer w7: v1(6930,4030) 7020,4030 v1(7045,4055)
  Bottom Layer w7: J4.2@4860.63,4918.5 5150.79,4918.5 TVS2_2.3@5156.69,4912.6 5184.17,4912.6 5212.38,4884.38 5278.78,4884.38 5290,4895.6 6870.6,4895.6 7120,4646.2 7120,4130 v1(7045,4055) ; XTX1.62@6863.78,4028.94 v1@6930,4028.94
USB3_P: J4.3 TVS2_2.2 XTX1.72 | length 3300.9
  Bottom Layer w7: J4.3@4860.63,4950 4910,4950 4917.25,4942.75 5195,4942.75 5195.3,4942.45 5213.45,4942.45 TVS2_2.2@5243.31,4912.6 6882.4,4912.6 6885,4910 6885,4905.24 7137,4653.24 7137,4110.23 6937.6,3910.83 XTX1.72@6863.78,3910.83
USB4_N: J5.2 TVS1_3.2 XTX1.147 | length 1872.8
  Bottom Layer w7: J5.2@4860.63,5968.5 4912.45,5968.5 4935.36,5945.6 5114.55,5945.6 5125.77,5934.38 5204.91,5934.38 TVS1_3.2@5233.13,5962.6 ; TVS1_3.2@5243.31,5962.6 5275,5962.6 5303.17,5990.77 6364.23,5990.77 6522.91,5832.09 XTX1.147@6640.35,5832.09
USB4_P: J5.3 TVS1_3.3 XTX1.145 | length 1875.1
  Bottom Layer w7: J5.3@4860.63,6000 4905,6000 4942.4,5962.6 TVS1_3.3@5156.69,5962.6 5184.17,5962.6 5212.38,5990.81 5279.18,5990.81 5296.13,6007.77 6371.27,6007.77 6522.02,5857.02 ; 6523.33,5855.71 XTX1.145@6640.35,5855.71
USB5_N: J6.2 TVS2_3.3 XTX1.127 | length 1963.8
  Bottom Layer w7: J6.2@4860.63,6518.5 TVS2_3.3@5156.69,6518.5 ; TVS2_3.3@5156.69,6512.6 5184.17,6512.6 5212.38,6484.38 6170.62,6484.38 6586.69,6068.31 XTX1.127@6640.35,6068.31
USB5_P: J6.3 TVS2_3.2 XTX1.125 | length 1973.8
  Bottom Layer w7: J6.3@4860.63,6550 5185,6550 5222.4,6512.6 TVS2_3.2@5243.31,6512.6 5250.91,6505 6175,6505 6588.07,6091.93 XTX1.125@6640.35,6091.93 XTX1.125@6637.28,6095
VSY: C29.2 D6.3 FB11.2 VGA1.14 | length 2737.7
  Top Layer w7: D6.3@9806.69,4565 9806.69,5221.69 v1(9860,5275) 10056.5,5275 FB11.2@10100,5231.5 C29.2@10100,5466.54 ; v1(10960,4810) VGA1.14@11180,4810
  Bottom Layer w7: v1(9860,5275) 10495,5275 v1(10960,4810)
WDTRIG: P2.9 XTX1.148 | length 2752.7
  Bottom Layer w7: XTX1.148@6864.76,5832.09 8002.09,5832.09 8820,6650 9215,6650 P2.9@9260,6605
pads on no net: D3.2 J1.4 J1.11 J1.12 J1.CGND J2.4 J2.11 J2.12 J2.CGND J3.4 J3.11 J3.12 J3.CGND J4.4 J4.11 J4.12 J4.CGND J5.4 J5.11 J5.12 J5.CGND J6.4 J6.11 J6.12 J6.CGND POWER.0 RESET.2 RESET.3 SATA1. SATA1.P1 SATA1.P2 SATA1.P3 SATA1.P13 SATA1.P14 SATA1.P15 VGA1. VGA1.4 VGA1.11 VGA1.CGND X1. XTX1.0 XTX1.3 XTX1.4 XTX1.7 XTX1.8 XTX1.9 XTX1.10 XTX1.11 XTX1.12 XTX1.13 XTX1.14 XTX1.15 XTX1.16 XTX1.17 XTX1.18 XTX1.21 XTX1.22 XTX1.23 XTX1.24 XTX1.25 XTX1.26 XTX1.27 XTX1.28 XTX1.29 XTX1.30 XTX1.31 XTX1.32 XTX1.33 XTX1.34 XTX1.37 XTX1.38 XTX1.39 XTX1.40 XTX1.41 XTX1.42 XTX1.43 XTX1.44 XTX1.45 XTX1.46 XTX1.47 XTX1.48 XTX1.49 XTX1.50 XTX1.53 XTX1.54 XTX1.55 XTX1.56 XTX1.57 XTX1.59 XTX1.60 XTX1.61 XTX1.63 XTX1.64 XTX1.65 XTX1.69 XTX1.70 XTX1.71 XTX1.73 XTX1.74 XTX1.75 XTX1.77 XTX1.78 XTX1.79 XTX1.81 XTX1.82 XTX1.85 XTX1.86 XTX1.87 XTX1.89 XTX1.90 XTX1.91 XTX1.93 XTX1.94 XTX1.95 XTX1.96 XTX1.97 XTX1.98 XTX1.103 XTX1.105 XTX1.109 XTX1.111 XTX1.114 XTX1.115 XTX1.116 XTX1.117 XTX1.118 XTX1.120 XTX1.121 XTX1.122 XTX1.123 XTX1.124 XTX1.128 XTX1.130 XTX1.131 XTX1.132 XTX1.133 XTX1.134 XTX1.137 XTX1.138 XTX1.139 XTX1.140 XTX1.141 XTX1.143 XTX1.144 XTX1.146 XTX1.149 XTX1.153 XTX1.154 XTX1.155 XTX1.156 XTX1.159 XTX1.160 XTX1.161 XTX1.162 XTX1.163 XTX1.164 XTX1.165 XTX1.166 XTX1.169 XTX1.170 XTX1.171 XTX1.172 XTX1.175 XTX1.176 XTX1.177 XTX1.178 XTX1.179 XTX1.181 XTX1.182 XTX1.185 XTX1.186 XTX1.187 XTX1.188 XTX1.189 XTX1.190 XTX1.191 XTX1.192 XTX1.193 XTX1.194 XTX1.195 XTX1.196 XTX1.197 XTX1.198 XTX1.209 XTX1.211 XTX1.212 XTX1.213 XTX1.214 XTX1.217 XTX1.218 XTX1.219 XTX1.220 XTX1.223 XTX1.224 XTX1.225 XTX1.226 XTX1.229 XTX1.230 XTX1.231 XTX1.232 XTX1.235 XTX1.236 XTX1.237 XTX1.238 XTX1.241 XTX1.242 XTX1.243 XTX1.244 XTX1.245 XTX1.246 XTX1.247 XTX1.248 XTX1.249 XTX1.250 XTX1.251 XTX1.252 XTX1.255 XTX1.256 XTX1.257 XTX1.258 XTX1.259 XTX1.260 XTX1.261 XTX1.262 XTX1.263 XTX1.264 XTX1.267 XTX1.268 XTX1.269 XTX1.270 XTX1.271 XTX1.272 XTX1.273 XTX1.274 XTX1.275 XTX1.276 XTX1.277 XTX1.278 XTX1.279 XTX1.280 XTX1.283 XTX1.284 XTX1.285 XTX1.286 XTX1.287 XTX1.288 XTX1.289 XTX1.290 XTX1.291 XTX1.292 XTX1.293 XTX1.294 XTX1.295 XTX1.296 XTX1.297 XTX1.298 XTX1.303 XTX1.305 XTX1.306 XTX1.307 XTX1.309 XTX1.313 XTX1.315 XTX1.316 XTX1.320 XTX1.322 XTX1.323 XTX1.324 XTX1.325 XTX1.326 XTX1.327 XTX1.328 XTX1.329 XTX1.330 XTX1.331 XTX1.332 XTX1.335 XTX1.336 XTX1.337 XTX1.338 XTX1.339 XTX1.340 XTX1.341 XTX1.343 XTX1.344 XTX1.345 XTX1.346 XTX1.347 XTX1.348 XTX1.351 XTX1.352 XTX1.353 XTX1.354 XTX1.355 XTX1.356 XTX1.357 XTX1.358 XTX1.359 XTX1.360 XTX1.361 XTX1.362 XTX1.363 XTX1.364 XTX1.367 XTX1.368 XTX1.369 XTX1.370 XTX1.371 XTX1.372 XTX1.373 XTX1.374 XTX1.375 XTX1.376 XTX1.377 XTX1.378 XTX1.379 XTX1.380 XTX1.383 XTX1.384 XTX1.385 XTX1.386 XTX1.387 XTX1.388 XTX1.390 XTX1.392 XTX1.394 XTX1.396 XTX1.398

## Polygon pours and split planes (outlines as drawn)
5V on PWR (split plane): 11279.9,2920.1 4520.1,2920.1 4520.1,6879.9 11279.9,6879.9
GND on GND (split plane): 11279.9,2920.1 4520.1,2920.1 4520.1,6879.9 11279.9,6879.9

## Silkscreen, mask and mechanical layers (free items; w line width, h text height)
Top Overlay:
  text "GND" at 9030,6780 h60
  text "5V" at 9385,6435 h60 r90
  text "GPE1#" at 9080,6270 h60 r90
  text "GPE2#" at 9180,6260 h60 r90
  text "WDTRIG" at 9290,6205 h60 r90
  text "EXTSMI#" at 8980,6155 h60 r90
  text "RSMRST#" at 8875,6140 h60 r90
Mechanical 9:
  lines w10: 2230,5961.67 4300,5961.67 ; 2230,6147.97 4300,6147.97 ; 2170,4390 ccw(c2230,4390) 2230,4330 4300,4330 ccw(c4300,4390) 4360,4390 4360,6710 ccw(c4300,6710) 4300,6770 2230,6770 ccw(c2230,6710) 2170,6710 2170,4390 ; 4500,2900 11300,2900 11300,6900 11200,6900 4500,6900 4500,2900
  text "Layer Stack Up Detail for: Carrier_Board.PcbDoc" at 2230,6429.58 h43
  text "Layer" at 2230,6078.47 h43
  text "Gerber" at 3789.78,6078.47 h43
  text "Name" at 2230,5992.47 h43
  text "Document" at 3789.78,5992.47 h43
  text "Top Layer" at 2230,5778.33 h60
  text "(.GTL)" at 3789.78,5778.33 h60
  text "PWR" at 2230,5421.67 h60
  text "(.GP1)" at 3789.78,5421.67 h60
  text "GND" at 2230,5065 h60
  text "(.GP2)" at 3789.78,5065 h60
  text "Bottom Layer" at 2230,4708.33 h60
  text "(.GBL)" at 3789.78,4708.33 h60
  text "^^ Board Outline" at 4600,2700 h100
  text "This board will be fabricated as a $66 each board, all standard spec" at 4570,2580 h60
  text "Please put silkscreen on BOTH sides" at 4565,2460 h60

## Text inside footprints (layer, text, board x,y; h text height)
C3: Top Overlay "+" at 9929.53,3520.87 h60 r90
C6_1: Top Overlay "+" at 5784.53,3816.83 h60 r90
C6_2: Top Overlay "+" at 5779.53,4720.87 h60 r90
C6_3: Top Overlay "+" at 5879.53,6164.83 h60 r90
C7_1: Top Overlay "+" at 5484.53,3816.83 h60 r90
C7_2: Top Overlay "+" at 5479.53,4720.87 h60 r90
C7_3: Top Overlay "+" at 5579.53,6164.83 h60 r90
P2: Top Overlay "2" at 8760,6685 h60; Top Overlay "1" at 8760,6585 h60; Top Overlay "1" at 9440,6585 h60; Top Overlay "1" at 9480,6585 h60; Top Overlay "12" at 9440,6685 h60
XTX1: Bottom Overlay "X4" at 11032.09,6532.87 h60; Bottom Overlay "X3" at 10955,4725 h60; Bottom Overlay "X2" at 6851.97,6528.94 h60; Bottom Overlay "X1" at 6851.97,4891.14 h60